# Altium PCB Shield.PcbDoc
Units mm, origin at the board's own origin, x right, y up, seen from the top; angles counter-clockwise.
Board outline 53.01 x 58.42 mm, 2 copper layers (Top, Bottom); 45 components, 50 nets, 181 pads, 111 vias.
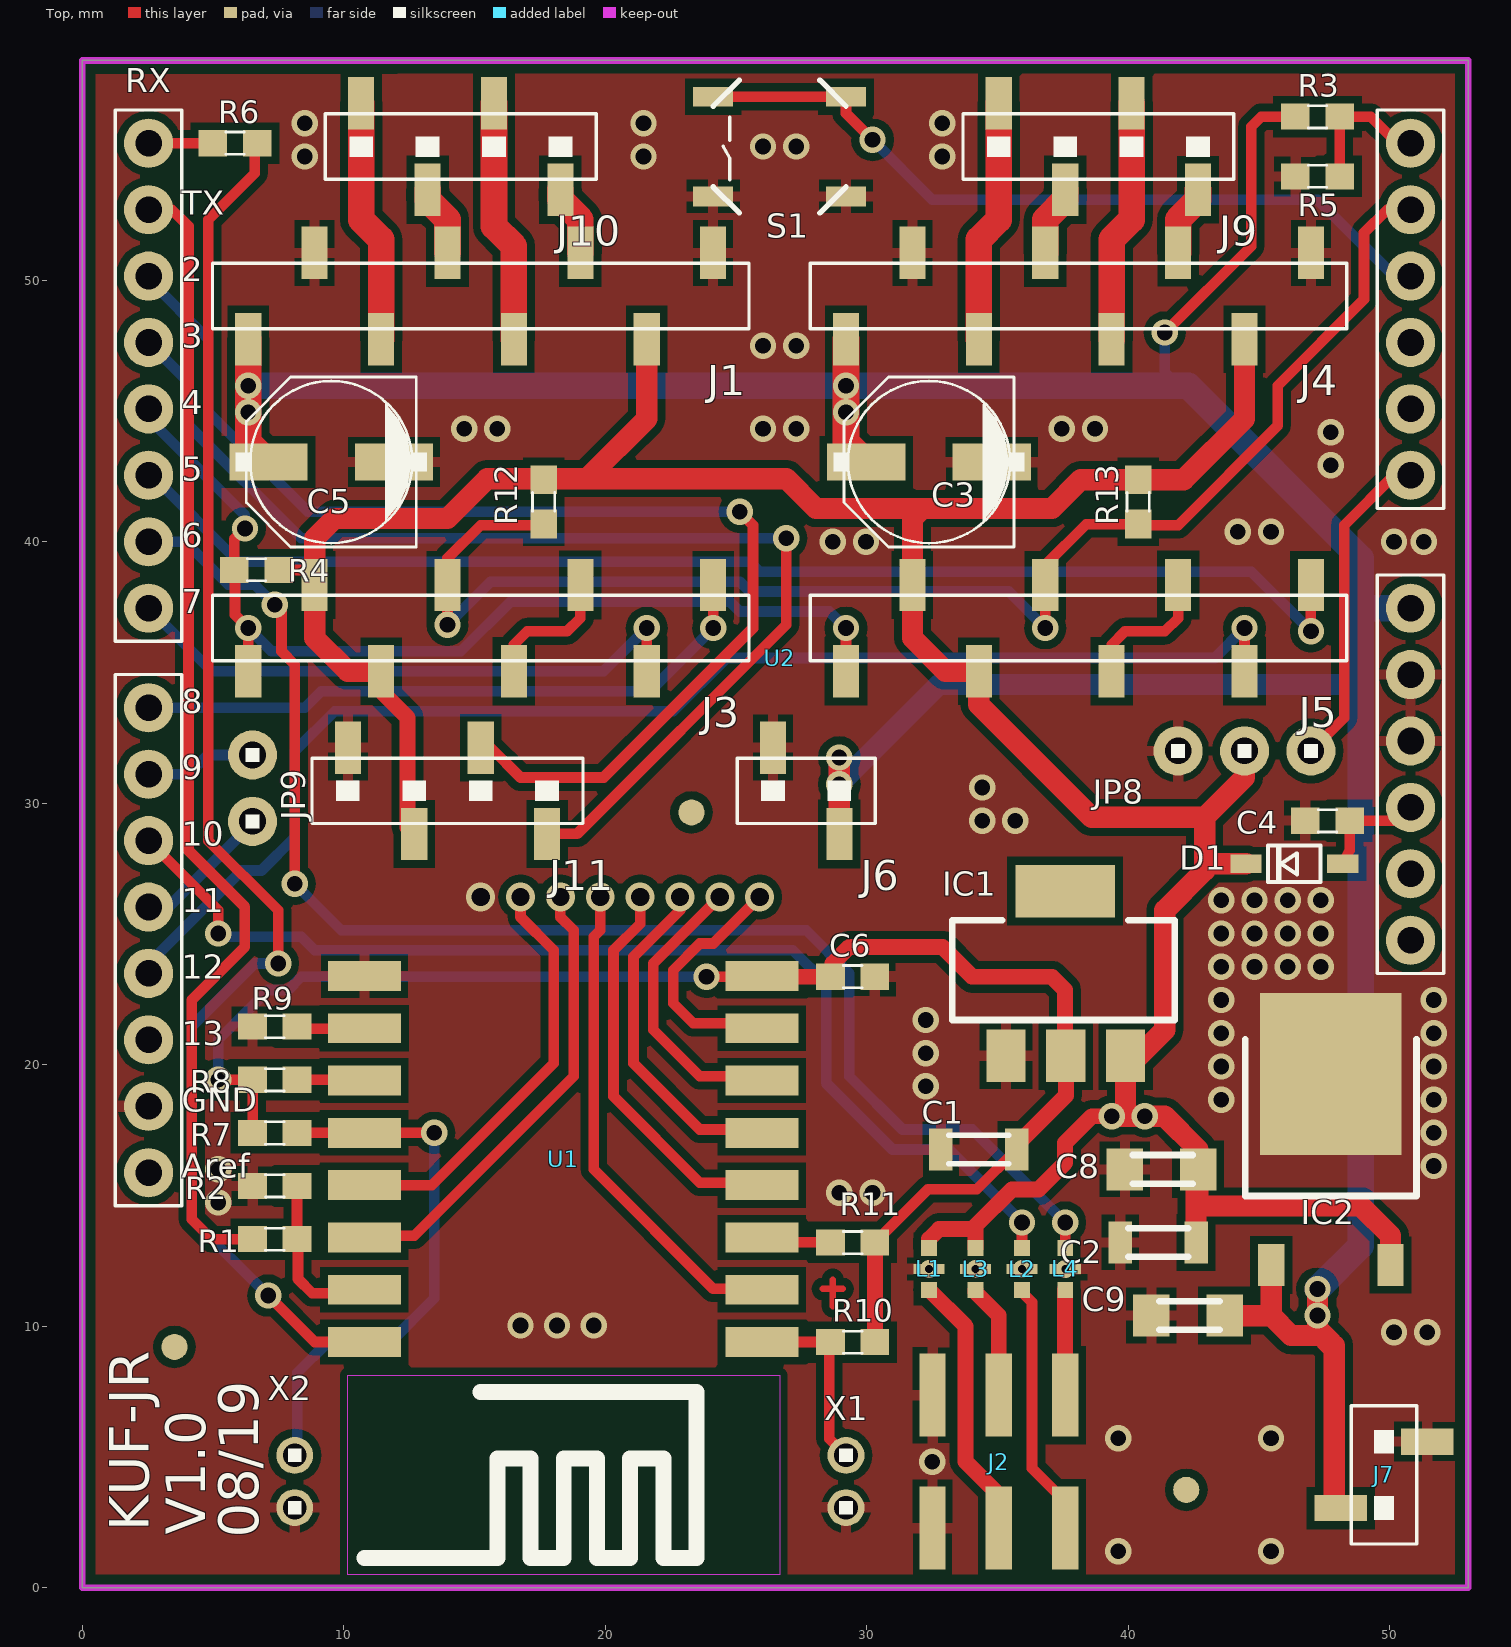
[diagram p0: Top view]
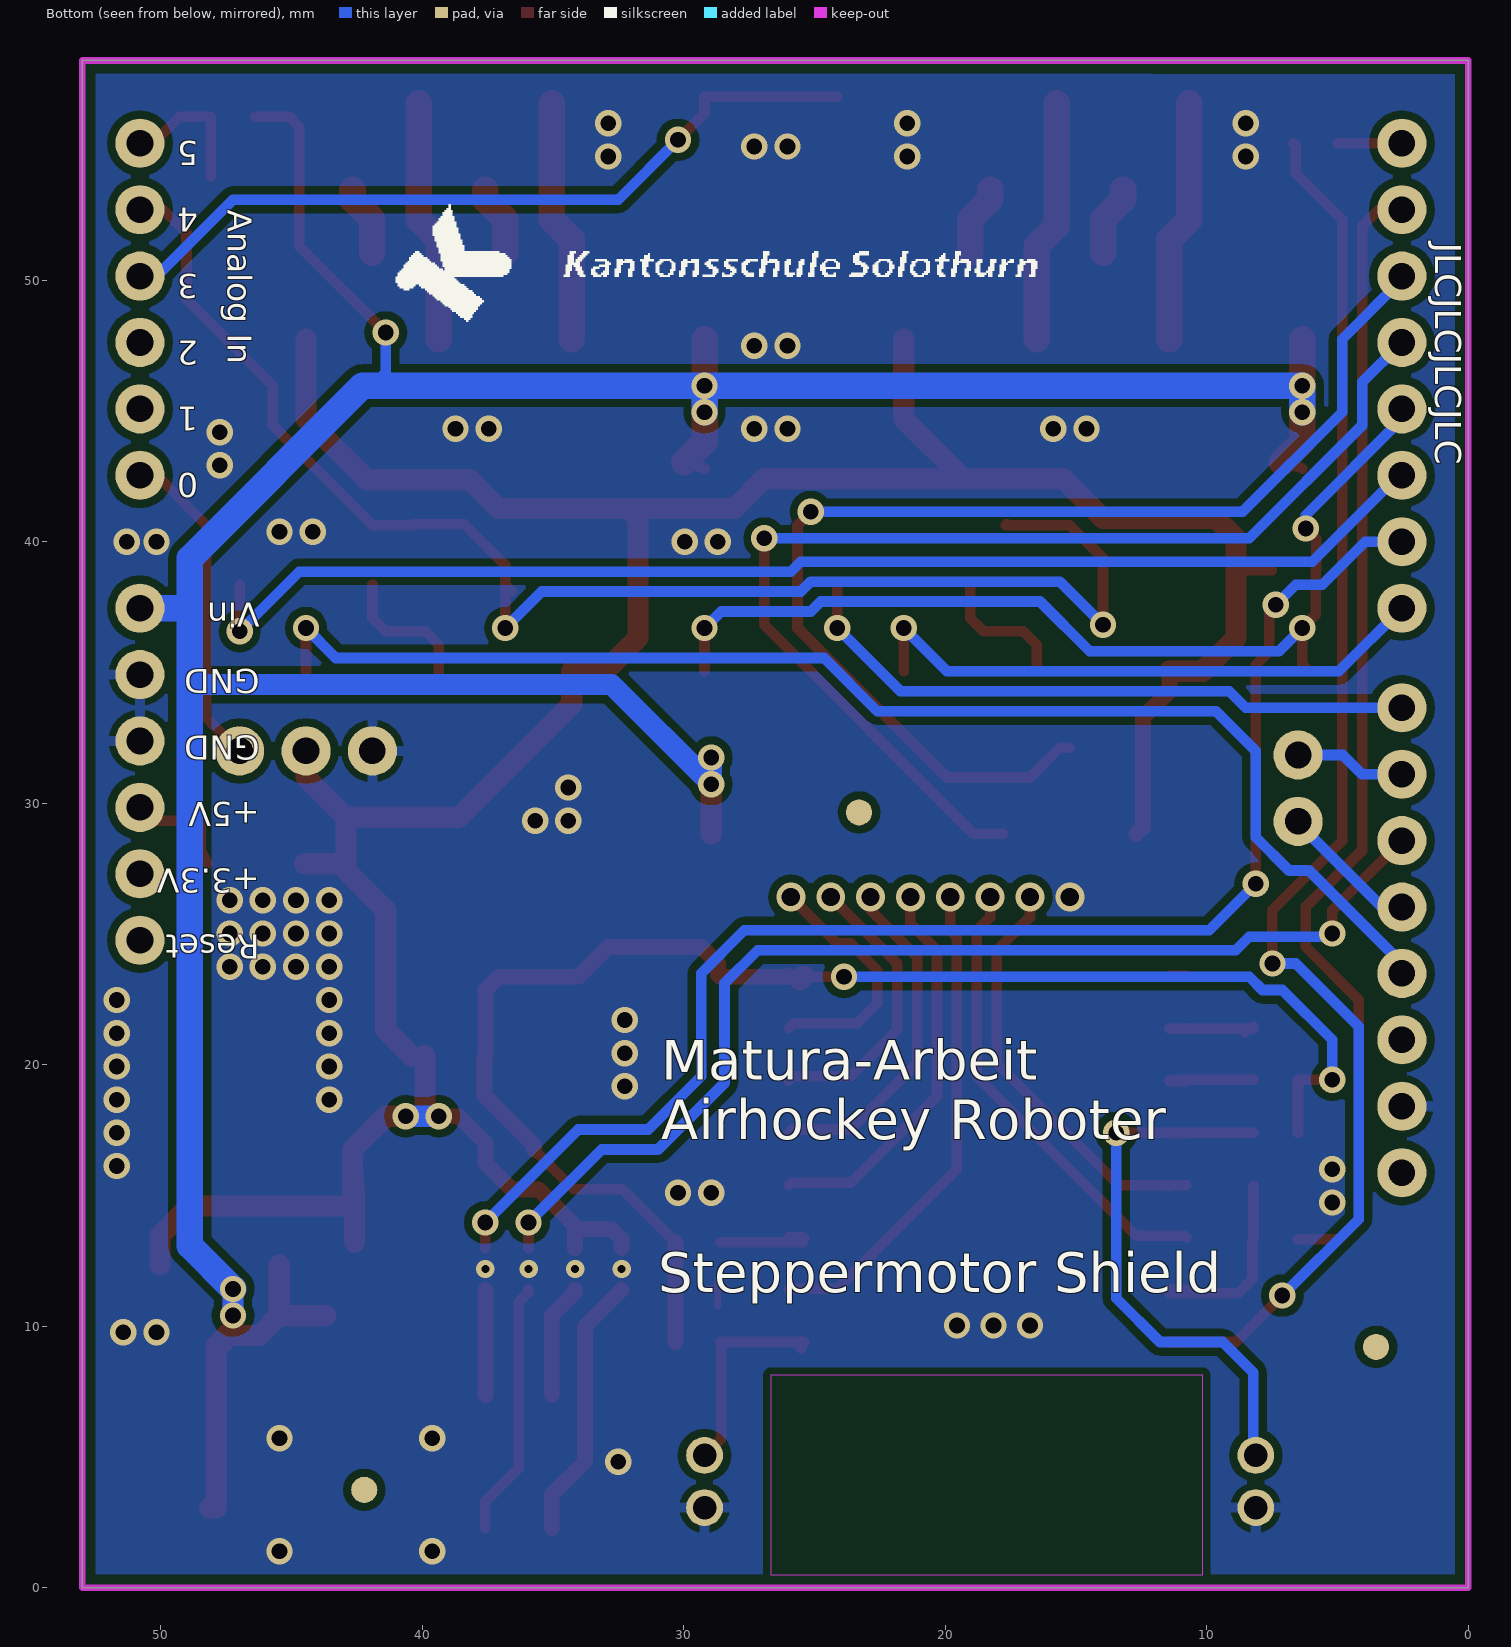
[diagram p1: Bottom view, seen from below]

## Layer stack, top to bottom
Top Solder: solder mask 0.0102, Solder Resist, Dk 3.5
Top: signal copper 0.035
Dielectric 1: dielectric 0.32, FR-4, Dk 4.8
Bottom: signal copper 0.035
Bottom Solder: solder mask 0.0102, Solder Resist, Dk 3.5

## Board outline
12.065,58.41 0,58.41 0,0 53.01,0 53.01,58.41 27.94,58.42 12.7,58.42

## Design rules (kind name [scope] priority, off if disabled: settings)
BoardOutlineClearance mdCopperDimension [All] p1: gap=0.254 ignorepadtopadclearanceinfootprint=FALSE except(0: Arc-SplitContinuation Track-SplitContinuation SMDPad-SplitContinuation THPad-SplitContinuation Via-SplitContinuation Fill-SplitContinuation Poly-SplitContinuation Region-SplitContinuation Text-SplitContinuation; 0.508: Poly-OutlineEdge Poly-CavityEdge Poly-CutoutEdge Poly-SplitBarrior)
Clearance Clearance_for_PolygonClass_Isolate_0 [InPolygonClass('Isolate_0')] p1: gap=0 ignorepadtopadclearanceinfootprint=FALSE except(0.508: Poly-Hole)
Clearance Clearance_for_PolygonClass_Isolate_12 [InPolygonClass('Isolate_12')] p2: gap=0 ignorepadtopadclearanceinfootprint=FALSE except(0.305: Arc-Poly Track-Poly SMDPad-Poly THPad-Poly Via-Poly Fill-Poly Poly-Poly Poly-Region Poly-Text; 0.508: Poly-Hole)
Clearance "Clearance (Same Net)" [All] p3: gap=0.203 ignorepadtopadclearanceinfootprint=FALSE
Clearance [All] p4: gap=0.203 ignorepadtopadclearanceinfootprint=FALSE
HoleSize [All] p1: absolutevalues=TRUE maxlimit=2540 minlimit=0.508 maxpercent=80.000 minpercent=20.000
HoleToHoleClearance mdDrill [All] p1: gap=0.203 allowstackedmicrovias=TRUE
PasteMaskExpansion mlMinCreamFrame [All] p1: expansion=0
PolygonConnect PolygonConnect_For_PolygonThermal_OFF [InPolygonClass('PolygonThermal_OFF')] p1: connectstyle=Direct reliefconductorwidth=0.254 reliefentries=4 polygonreliefangle="90 Angle" airgapwidth=0.254
PolygonConnect PolygonConnect_For_PolygonThermal_ON_Width160000_Gap100000 [InPolygonClass('PolygonThermal_ON_Width160000_Gap100000') vs Not IsVia] p2: connectstyle=Relief reliefconductorwidth=0.406 reliefentries=4 polygonreliefangle="90 Angle" airgapwidth=0.254
PolygonConnect ThermalVias [IsVia] p3: connectstyle=Direct reliefconductorwidth=0.254 reliefentries=4 polygonreliefangle="90 Angle" airgapwidth=0.254
PolygonConnect [All] p4: connectstyle=Relief reliefconductorwidth=0.254 reliefentries=4 polygonreliefangle="90 Angle" airgapwidth=0.254
RoutingVias [All] p1: holewidth=0.508 width=0.914 viastyle="Through Hole" minholewidth=0.508 minwidth=0.914 maxholewidth=2.54 maxwidth=2.54
SolderMaskExpansion mlMinStopFrame [All] p1: expansion=0.102
Width [All] p1: maxlimit=254 minlimit=0.254 preferedwidth=0.254
27 further rules are at their usual default settings.

## Classes and differential pairs
polygon class PolygonThermal_OFF: Polygon_3_Net_GND
polygon class PolygonThermal_ON_Width160000_Gap100000: Polygon_1_Net_GND Polygon_2_Net_GND
polygon class Isolate_0: Polygon_3_Net_GND
polygon class Isolate_12: Polygon_1_Net_GND Polygon_2_Net_GND

## Components (designator, comment, footprint, x,y, rotation, side; value= is the part's Value field where it differs from the comment)
C1 "4.7uF" 1206-CAP 34.29,16.764 r180 top
C2 "4.7uF" 1206-CAP 41.148,13.208 r180 top
C3 "100uF" PANASONIC_D 32.385,43.053 r180 top
C4 ".1uF" 0603-CAP 47.625,29.337 r180 top
C5 "100uF" PANASONIC_D 9.525,43.053 r180 top
C6 ".1uF" 0603-CAP 29.464,23.368 r0 top
C8 "10uF" EIA3216 41.275,16.002 r0 top
C9 "10uF" EIA3216 42.291,10.414 r0 top
D1 "MBR120VLSFT1G" SOD-123 46.355,27.686 r0 top
IC1 "REG1117" SOT223 37.592,23.495 r0 top
IC2 "7805DT" TO252 47.752,17.145 r0 top
J1 "PRT-11543" 1X08_SMD 6.35,49.403 r180 top
J2 "" 2X3_SMT_POSTS 35.052,4.826 r0 top
J3 "" 1X08_SMD 6.35,36.703 r180 top
J4 "PRT-11543" 1X08_SMD 29.21,49.403 r180 top
J5 "PRT-11543" 1X08_SMD 29.21,36.703 r180 top
J6 "" 1X02_SMD_STRAIGHT_REVERSED 27.686,30.48 r180 top
J7 "" 1X02_SMD_STRAIGHT_REVERSED 49.784,4.318 r90 top
J9 "" 1X04_SMD_STRAIGHT_REVERSED 38.862,55.118 r180 top
J10 "" 1X04_SMD_STRAIGHT_REVERSED 14.478,55.118 r180 top
J11 "" 1X04_SMD_STRAIGHT_REVERSED 13.97,30.48 r180 top
JP8 "" 1X03 46.99,32.004 r180 top
JP9 "" 1X02 6.513,31.849 r270 top
L1 "" KNH16_EMI 32.385,12.192 r90 top
L2 "" KNH16_EMI 35.941,12.192 r90 top
L3 "" KNH16_EMI 34.163,12.192 r90 top
L4 "" KNH16_EMI 37.592,12.192 r90 top
R1 "1k" 0603-RES 7.366,13.335 r180 top
R2 "2k2" 0603-RES 7.366,15.367 r0 top
R3 "33k" 0603-RES 47.244,56.261 r180 top
R4 "" 0603-RES 6.667,38.925 r0 top
R5 "22k" 0603-RES 47.244,53.975 r0 top
R6 "1k" 0603-RES 5.842,55.245 r0 top
R7 "10k" 0603-RES 7.366,17.399 r180 top
R8 "10k" 0603-RES 7.366,19.431 r180 top
R9 "" 0603-RES 7.366,21.463 r180 top
R10 "10k" 0603-RES 29.464,9.398 r180 top
R11 "10k" 0603-RES 29.464,13.208 r180 top
R12 "4k7" 0603-RES 17.653,41.529 r90 top
R13 "4k7" 0603-RES 40.386,41.529 r90 top
S1 "" TACTILE_SWITCH_SMD 26.67,55.118 r180 top
U1 "" ESP-12_SMD 19.05,15.113 r90 top
U2 "" DUEMILANOVE_VIAS 0,13.335 r0 top
X1 "87758-0216" 87758-0216 29.21,4.064 r180 top
X2 "87758-0216" 87758-0216 8.128,4.064 r180 top

## Footprints (in the part's own frame and the unit in brackets; to place one, negate y for a bottom-side part, rotate by r counter-clockwise, add the part's x,y. Pads: shape width x height; smd on the part's side, far side on the other; paste and mask are expansions set on the pad)
1X02 [mil] "1X02"
  round 74 / inner round 60 / far side round 74 hole 40: 1(0,0) 2(100,0)
  silkscreen extent -10,-10 110,10, body extent -30,-30 130,30, height 150
1X02_SMD_STRAIGHT_REVERSED [mm] "1X02_SMD_STRAIGHT_REVERSED"
  rect 1x2 smd: 1(1.27,-1.65) 2(-1.27,1.65)
  silkscreen extent -2.64,-1.25 2.64,1.25, body extent -2.71,-2.65 2.71,2.65, height 3.81
1X03 [mil] "1X03"
  round 74 / inner round 60 / far side round 74 hole 40: 1(0,0) 2(100,0) 3(200,0)
  silkscreen extent -10,-10 210,10, body extent -30,-30 230,30, height 150
1X04_SMD_STRAIGHT_REVERSED [mm] "1X04_SMD_STRAIGHT_REVERSED"
  rect 1x2 smd: 1(3.81,-1.65) 2(1.27,1.65) 3(-1.27,-1.65) 4(-3.81,1.65)
  silkscreen extent -5.18,-1.25 5.18,1.25, body extent -5.25,-2.65 5.25,2.65, height 3.81
1X08_SMD [mm] "1X08_SMD"
  rect 1x2 smd: 1(0,1.65) 2(-2.54,-1.65) 3(-5.08,1.65) 4(-7.62,-1.65) 5(-10.16,1.65) 6(-12.7,-1.65) 7(-15.24,1.65) 8(-17.78,-1.65)
  silkscreen extent -19.15,-1.25 1.37,1.25, body extent -19.22,-2.65 1.44,2.65, height 3.81
2X3_SMT_POSTS [mm] "2X3_SMT_POSTS"
  rect 1x3.17 smd: 1(-2.54,-2.54) 2(-2.54,2.54) 3(0,-2.54) 4(0,2.54) 5(2.54,-2.54) 6(2.54,2.54)
  body extent -3.04,-4.12 3.04,4.12, height 1.27
0603-CAP [mm] "0603-CAP"
  rect 1.1x1 smd: 1(-0.85,0) 2(0.85,0)
  silkscreen extent -0.36,-0.42 0.36,0.43, body extent -1.5,-1.01 1.5,1.01, height 3.81
0603-RES [mm] "0603-RES"
  rect 1.1x1 smd: 1(-0.85,0) 2(0.85,0)
  silkscreen extent -0.36,-0.42 0.36,0.43, body extent -1.5,-1.01 1.5,1.01, height 3.81
1206-CAP [mm] "1206-CAP"
  rect 0.9x1.6 smd: P$1(-1.45,0) P$2(1.45,0)
  silkscreen extent -1.15,-0.55 1.15,0.55, body extent -2.05,-1.15 2.05,1.15, height 3.81
87758-0216 [mm] "87758-0216"
  round 1.408 / inner round 1.524 / far side round 1.408 hole 0.9: 1(0,-1) 2(0,1)
  silkscreen extent -0.25,-1.25 0.25,1.25, body extent -0.77,-1.77 0.77,1.77, height 3.81
DUEMILANOVE_VIAS [mil] "DUEMILANOVE_VIAS"
  round 74 / inner round 60 / far side round 74 hole 40: 3.3V(2000,550) 5V(2000,650) A0(2000,1150) A1(2000,1250) A2(2000,1350) A3(2000,1450) A4(2000,1550) A5(2000,1650) AREF(100,100) D2(100,1450) D3(100,1350) D4(100,1250) D5(100,1150) D6(100,1050) D7(100,950) D8(100,800) D9(100,700) D10(100,600) D11(100,500) D12(100,400) D13(100,300) GND@0(2000,750) GND@1(2000,850) GND@2(100,200) RES(2000,450) RX(100,1650) TX(100,1550) VIN(2000,950)
  silkscreen extent 50,50 2050,1700, body extent 47,47 2053,1703, height 150
EIA3216 [mm] "EIA3216"
  rect 1.4x1.6 smd: A(1.4,0) C(-1.4,0)
  body extent -2.1,-0.8 2.1,0.8, height 1.27
ESP-12_SMD [mil] "ESP-12_SMD"
  rect 45x110 smd: S1(-225,-273.43) S2(-146.26,-273.43) S3(-67.52,-273.43) S4(11.22,-273.43) S5(89.96,-273.43) S6(168.7,-273.43) S7(247.44,-273.43) S8(326.18,-273.43) S9(326.18,325) S10(247.44,325) S11(168.7,325) S12(89.96,325) S13(11.22,325) S14(-67.52,325) S15(-146.26,325) S16(-225,325)
  Top keep-out region: -575,350 -275,350 -275,-300 -575,-300 -575,350
  Bottom keep-out region: -575,350 -275,350 -275,-300 -575,-300 -575,350
  silkscreen extent -550,-175 -300,325, body extent -575,-328 349,380, height 150
KNH16_EMI [mil] "KNH16_EMI"
  rect 23.62x23.62 smd: P$1(-31.5,0) P$2(31.5,0)
  rect 15.75x15.75 smd: P$3(0,-15.75) P$4(0,15.75)
  body extent -43,-24 43,24, height 50
PANASONIC_D [mm] "PANASONIC_D"
  rect 3x1.4 smd: +(2.4,0) -(-2.4,0)
  silkscreen extent -3.65,-3.25 3.65,3.25, body extent -3.9,-3.3 3.9,3.3, height 3.81
SOD-123 [mm] "SOD-123"
  rect 1.2x0.7 smd: A(1.85,0) C(-1.85,0)
  silkscreen extent -1,-0.7 1,0.7, body extent -2.45,-0.78 2.45,0.78, height 3.81
SOT223 [mil] "SOT223"
  rect 59x79 smd: 1(-89,-124) 2(1,-124) 3(91,-124)
  rect 150x79 smd: 4(0,124)
  body extent -118,-164 120,164, height 150
TACTILE_SWITCH_SMD [mil] "TACTILE_SWITCH_SMD"
  rect 60x30 smd: 1(-100,75) 2(100,75) 3(-100,-75) 4(100,-75)
  silkscreen extent -100,-100 100,100, body extent -130,-104 130,104, height 150
TO252 [mm] "TO252"
  rect 1x1.6 smd: 1(-2.28,-4.8) 2(2.28,-4.8)
  rect 5.4x6.2 smd: 3(0,2.5)
  body extent -3.39,-5.6 3.39,5.6, height 3.81

## Part data
C1 C2: library part 1206-CAP, PackageName=1206-CAP
C3 C5: library part PANASONIC_D, PackageName=PANASONIC_D
C4 C6: library part 0603-CAP, PackageName=0603-CAP
C8 C9: library part EIA3216, PackageName=EIA3216
D1: library part SOD-123, PackageName=SOD-123
IC1: library part SOT223, PackageName=SOT223
IC2: library part TO252, PackageName=TO252
J1 J3 J4 J5: library part 1X08_SMD, PackageName=1X08_SMD
J2: library part 2X3_SMT_POSTS, PackageName=2X3_SMT_POSTS
J6 J7: library part 1X02_SMD_STRAIGHT_REVERSED, PackageName=1X02_SMD_STRAIGHT_REVERSED
J9 J10 J11: library part 1X04_SMD_STRAIGHT_REVERSED, PackageName=1X04_SMD_STRAIGHT_REVERSED
JP8: library part 1X03, PackageName=1X03
JP9: library part 1X02, PackageName=1X02
L1 L2 L3 L4: library part KNH16_EMI, PackageName=KNH16_EMI
R1 R2 R3 R4 R5 R6 R7 R8 R9 R10 R11 R12 R13: library part 0603-RES, PackageName=0603-RES
S1: library part TACTILE_SWITCH_SMD, PackageName=TACTILE_SWITCH_SMD
U1: library part ESP-12_SMD, PackageName=ESP-12_SMD
U2: library part DUEMILANOVE_VIAS, PackageName=DUEMILANOVE_VIAS
X1 X2: PackageName=87758-0216

## Free pads (board coordinates)
  round 1 all layers, no hole: 4(3.527,9.213) 4(23.3,29.654)
  round 1 all layers, no hole paste+0: 4(42.223,3.746)

## Via types
v1: diameter 1.006/1.006 (per signal layer), hole 0.6, Top to Bottom, tented both sides, 99 vias
v2: diameter 1.106/1.106 (per signal layer), hole 0.7, Top to Bottom, 8 vias
v3: diameter 0.706/0.706 (per signal layer), hole 0.3, Top to Bottom, tented both sides, 4 vias

## Nets (pads, with @x,y where several pads share a name; then routed paths per layer and width w, separated by ;. In a path a pad name is that pad's centre, name@x,y a point inside that pad or via, vN(x,y) a via of type N, cw(c..) or ccw(c..) an arc to the next point about the centre after c; other vN are vias at no path point)
3.3V: C1.P$1 C6.1 IC1.2 R7.2 R8.2 R10.1 R11.1 U1.S8 | length 57.7
  Top w0.406: v1(5.207,19.431) R8.2 R7.2 ; v1(23.876,23.368) 25.385,23.368 25.415,23.398 U1.S8 U1.S8@25.995,23.256 ; R11.1 32.346,15.24 34.216,15.24 C1.P$1 C1.P$1@35.814,16.69
  Top w0.61: U1.S8 26.025,23.368 C6.1 28.702,23.456 28.702,23.876 29.337,24.511 32.893,24.511 34.036,23.368 37.084,23.368 37.592,22.86 37.592,20.371 IC1.2 37.617,18.821 35.74,16.944 C1.P$1 ; R10.1 R11.1
  Top w0.813: U1.S8@25.415,23.398 U1.S8@25.557,23.256
  Bottom w0.406: v1(5.207,19.431) 5.207,20.955 7.112,22.86 7.874,22.86 8.382,23.368 v1(23.876,23.368)
5V: C2.P$1 C8.A D1.C IC1.3 IC2.2 J1.7 J3.2 J3.3 J4.7 J5.2 J5.3 J11.2 JP8.2 L1.P$2 L3.P$2 R4.2 R12.2 R13.2 | length 131.8
  Top w0.305: v1@40.64,17.777 v1(40.64,18.034)
  Top w0.406: R4.2 8.826,38.925 J3.2@8.89,38.862 ; R12.2 19.265,42.379 19.304,42.418
  Top w0.61: J3.3 J3.3 11.43,34.29 12.446,33.274 12.446,29.084 J11.2 ; L1.P$2 32.385,13.335 32.766,13.716 34.163,13.716 ; L3.P$2 34.163,13.716 ; v1(39.37,18.034) 38.608,18.034 37.592,17.018 37.592,16.256 36.576,15.24 35.56,15.24 34.163,13.843 34.163,13.716 ; 39.878,18.034 39.903,18.059 ; IC1.3 39.929,20.32 IC1.3@40.386,20.32 ; 42.926,27.432 42.926,27.686
  Top w0.813: J3.3 J3.3 10.16,35.052 8.89,36.322 J3.2 8.89,38.862 8.89,40.132 9.652,40.894 13.97,40.894 15.494,42.418 19.304,42.418 ; J1.7 21.59,44.704 19.304,42.418 ; v1(39.37,18.034) 39.878,18.034 v1(40.64,18.034) 41.402,18.034 42.675,16.761 C8.A ; 39.903,18.059 IC1.3 ; IC1.3@40.386,20.32 41.402,21.336 41.402,25.908 42.926,27.432 ; C2.P$1 42.598,15.163 C8.A ; JP8.2 44.45,30.988 42.926,29.464 ; J4.7 44.45,44.704 42.125,42.379 R13.2 38.188,42.379 37.084,41.275 32.131,41.275 ; D1.C 42.926,27.686 42.926,29.464 ; IC2.2 50.032,13.468 48.895,14.605 42.675,14.605 C8.A ; 19.304,42.418 26.924,42.418 28.067,41.275 32.131,41.275 ; 32.131,41.275 31.75,40.894 J5.2 31.75,36.322 33.019,35.053 J5.3 34.29,33.782 38.608,29.464 42.926,29.464
  Bottom w0.813: v1(39.37,18.034) v1(40.64,18.034)
A0: JP8.1 U2.A0 | length 12.5
  Top w0.406: JP8.1 48.26,33.274 48.26,40.64 50.165,42.545 U2.A0
A3: S1.3 S1.4 U2.A3 | length 29.9
  Top w0.406: S1.4 S1.3 29.21,56.388 v1(30.226,55.372)
  Bottom w0.406: v1(30.226,55.372) 32.512,53.086 47.244,53.086 50.165,50.165 U2.A3
A4: J3.4 J5.4 R12.1 R13.1 U2.A4 | length 55.9
  Top w0.406: v1(13.97,36.83) J3.4 13.97,39.37 15.24,40.64 17.692,40.64 R12.1 ; J5.4@36.577,38.1 36.704,38.227 J5.4 ; v1(36.83,36.703) J5.4 ; U2.A4 49.911,52.705 49.022,51.816 49.022,49.276 45.72,45.974 45.72,44.45 41.91,40.64 40.425,40.64 R13.1 38.393,40.679 36.83,39.116 J5.4
  Bottom w0.406: v1(13.97,36.83) 15.621,38.481 25.146,38.481 25.527,38.1 35.433,38.1 v1(36.83,36.703)
ADC: U1.S2 | length 18.9
  Top w0.406: v2(19.812,26.416) 19.812,25.146 19.558,24.892 19.558,16.002 24.13,11.43 25.963,11.43 U1.S2
D4: J3.1 J5.1 R4.1 U2.D4 | length 38.2
  Top w0.406: J3.1@6.223,35.179 J3.1 ; v1(6.223,40.513) 5.818,40.108 R4.1 5.842,38.901 5.842,37.211 v1(6.35,36.703) J3.1 J3.1 ; J5.1 v1(29.21,36.703)
  Bottom w0.406: U2.D4 2.54,44.704 6.223,41.021 v1(6.223,40.513) ; v1(6.35,36.703) 7.239,35.814 14.478,35.814 16.383,37.719 24.765,37.719 25.146,37.338 28.575,37.338 v1(29.21,36.703)
D5: J5.8 U2.D5 | length 48.8
  Top w0.406: v1(46.99,36.576) J5.8
  Bottom w0.406: U2.D5@2.413,42.545 U2.D5 2.667,42.545 5.969,39.243 25.527,39.243 25.908,38.862 44.704,38.862 v1(46.99,36.576)
D7: J3.7 U2.D7 | length 22.4
  Top w0.406: J3.7 v1(21.59,36.703)
  Bottom w0.406: U2.D7 4.953,35.052 19.939,35.052 v1(21.59,36.703)
D8: J3.8 U2.D8 | length 24.5
  Top w0.406: v1(24.13,36.703) J3.8
  Bottom w0.406: U2.D8 8.509,33.655 9.144,34.29 21.717,34.29 v1(24.13,36.703)
D9: JP9.1 U2.D9 | length 4.3
  Bottom w0.406: U2.D9 4.064,31.115 4.798,31.849 JP9.1
D11: JP9.2 U2.D11 | length 5.4
  Bottom w0.406: U2.D11 3.302,26.035 6.513,29.246 JP9.2
D12: J5.7 U2.D12 | length 51.2
  Top w0.406: J5.7 v1(44.45,36.703)
  Bottom w0.406: U2.D12 2.54,23.876 6.096,27.432 6.858,27.432 8.128,28.702 8.128,32.004 9.652,33.528 22.606,33.528 24.638,35.56 43.307,35.56 v1(44.45,36.703)
ESP_RXD: R1.1 R2.2 U1.S15 | length 7.7
  Top w0.406: R2.2 R1.1 8.255,13.296 8.255,11.811 8.795,11.271 11.43,11.271 11.43,11.383 11.415,11.398 U1.S15
ESP_TXD: R6.2 U1.S16 | length 54.7
  Top w0.406: R6.2 6.604,55.157 6.604,54.102 4.826,52.324 4.826,28.575 7.493,25.908 v1(7.493,23.876) ; v1(7.112,11.176) 8.89,9.398 U1.S16 ; U1.S16 10.81,9.383 11.43,9.383 11.415,9.398 U1.S16
  Bottom w0.406: v1(7.112,11.176) 4.191,14.097 4.191,21.463 6.604,23.876 v1(7.493,23.876)
GND: C1.P$2 C2.P$2 C3.- C4.2 C5.- C6.2 C8.C C9.C IC1.1 IC2.3 J1.2 J1.8 J2.1 J2.2 J4.2 J4.8 J6.1 J7.1 J11.1 JP8.3 L1.P$3 L1.P$4 L2.P$3 L2.P$4 L3.P$3 L3.P$4 L4.P$3 L4.P$4 R2.1 R5.1 R9.2 S1.1 S1.2 U1.S9 U2.GND@0 U2.GND@1 U2.GND@2 X1.2 X2.2 | length 0.6
  Top w0.406: U1.S9 11.415,23.398 U1.S9@11.43,23.383
  other v1: 39.624,1.397 45.466,1.397 32.512,4.826 39.624,5.715 45.466,5.715 50.165,9.779 51.435,9.779 16.764,10.033 18.161,10.033 19.558,10.033 5.207,14.732 28.956,15.113 30.226,15.113 5.207,16.002 51.689,16.129 51.689,17.399 43.561,18.669 51.689,18.669 32.258,19.177 43.561,19.939 51.689,19.939 32.258,20.447 43.561,21.209 51.689,21.209 32.258,21.717 43.561,22.479 51.689,22.479 43.561,23.749 44.831,23.749 46.101,23.749 47.371,23.749 43.561,25.019 44.831,25.019 46.101,25.019 47.371,25.019 43.561,26.289 44.831,26.289 46.101,26.289 47.371,26.289 34.417,29.337 35.687,29.337 34.417,30.607 28.702,40.005 29.972,40.005 50.165,40.005 51.308,40.005 44.196,40.386 45.466,40.386 47.752,42.926 47.752,44.196 14.605,44.323 15.875,44.323 26.035,44.323 27.305,44.323 37.465,44.323 38.735,44.323 26.035,47.498 27.305,47.498 8.509,54.737 21.463,54.737 32.893,54.737 26.035,55.118 27.305,55.118 8.509,56.007 21.463,56.007 32.893,56.007
  other v2: 15.24,26.416
  other v3: 32.385,12.192 34.163,12.192 35.941,12.192 37.592,12.192
GPIO4: U1.S14 | length 17.6
  Top w0.406: U1.S14 10.859,13.462 12.7,13.462 18.796,19.558 18.796,25.146 18.288,25.654 v2(18.288,26.416)
GPIO5: U1.S13 | length 16.1
  Top w0.406: U1.S13 U1.S13@11.415,15.398 ; U1.S13@11.446,15.367 U1.S13@11.415,15.398 ; v2(16.764,26.416) 16.764,25.654 18.034,24.384 18.034,20.066 13.366,15.398 U1.S13@11.415,15.398
GPIO12: U1.S6 | length 11.1
  Top w0.406: v2(24.384,26.416) 21.844,23.876 21.844,21.336 23.622,19.558 25.835,19.558 U1.S6
GPIO13: U1.S7 | length 9.5
  Top w0.406: v2(25.908,26.416) 24.13,24.638 23.622,24.638 22.606,23.622 22.606,22.352 23.368,21.59 25.803,21.59 U1.S7
GPIO14: U1.S5 | length 13.1
  Top w0.406: v2(22.86,26.416) 22.86,25.908 21.082,24.13 21.082,20.066 23.622,17.526 25.867,17.526 U1.S5
GPIO16: U1.S4 | length 15.1
  Top w0.406: v2(21.336,26.416) 21.336,25.4 20.32,24.384 20.32,18.796 23.622,15.494 25.899,15.494 U1.S4
IMU_SCL: J11.4 U2.D3 | length 44.2
  Top w0.406: J11.4 18.924,28.83 26.924,36.83 v1(26.924,40.132)
  Bottom w0.406: U2.D3 4.064,46.101 4.064,44.45 8.382,40.132 v1(26.924,40.132)
IMU_SDA: J11.3 U2.D2 | length 46
  Top w0.406: J11.3 15.622,32.13 16.764,30.988 19.939,30.988 25.654,36.703 25.654,40.64 v1(25.146,41.148)
  Bottom w0.406: U2.D2 2.54,50.038 4.826,47.752 4.826,44.958 8.636,41.148 v1(25.146,41.148)
N$1: J1.3 J10.1 | length 9.3
  Top w1.016: J10.1 10.668,52.324 11.43,51.562 J1.3
N$2: J1.4 J10.2 | length 2.7
  Top w1.016: J10.2 13.208,53.086 13.97,52.324 J1.4
N$3: R7.1 U1.S12 X2.1 | length 22.5
  Top w0.406: R7.1 11.414,17.399 11.43,17.383 10.795,17.383 U1.S12 U1.S12 v1(13.462,17.399)
  Bottom w0.406: X2.1 8.219,5.318 8.219,8.219 9.398,9.398 11.791,9.398 13.462,11.069 v1(13.462,17.399)
N$4: R8.1 U1.S11 | length 3.7
  Top w0.406: R8.1 U1.S11@11.176,19.431 ; U1.S11 10.795,19.383 U1.S11@11.176,19.383 ; U1.S11@11.255,19.431 U1.S11@11.176,19.431 ; U1.S11@11.43,19.383 U1.S11@11.176,19.383 ; U1.S11@11.176,19.383 U1.S11@11.176,19.431
N$5: R1.2 U2.TX | length 44.1
  Top w0.406: U2.TX 3.429,52.705 4.064,52.07 4.064,28.194 6.223,26.035 6.223,24.511 4.191,22.479 4.191,14.097 4.953,13.335 R1.2
N$6: J1.5 J10.3 | length 9.3
  Top w1.016: J10.3 15.748,52.07 16.51,51.308 J1.5
N$7: J1.6 J10.4 | length 2.7
  Top w1.016: J10.4 18.288,53.086 19.05,52.324 J1.6
N$8: J4.3 J9.1 | length 9.3
  Top w1.016: J4.3 34.29,51.562 35.052,52.324 J9.1
N$9: J4.4 J9.2 | length 2.7
  Top w1.016: J4.4 36.83,52.324 37.592,53.086 J9.2
N$10: J4.5 J9.3 | length 9.3
  Top w1.016: J4.5 39.37,51.562 40.132,52.324 J9.3
N$11: J3.5 J3.6 | length 5.2
  Top w0.406: J3.5 16.51,36.068 17.018,36.576 18.542,36.576 19.05,37.084 J3.6
N$12: J5.5 J5.6 | length 5.2
  Top w0.406: J5.5 39.37,36.068 39.878,36.576 41.402,36.576 41.91,37.084 J5.6
N$13: R3.1 R5.2 U2.A5 | length 5.4
  Top w0.406: R5.2 R3.1 49.276,56.261 50.292,55.245 U2.A5
N$14: R6.1 U2.RX | length 2.5
  Top w0.406: U2.RX R6.1
N$16: J4.6 J9.4 | length 2.7
  Top w1.016: J4.6 41.91,52.324 42.672,53.086 J9.4
N$17: J2.4 L3.P$1 | length 4.4
  Top w0.61: L3.P$1 34.163,11.303 35.052,10.414 J2.4
N$18: R9.1 U1.S10 | length 3.7
  Top w0.406: R9.1@8.55,21.256 R9.1 8.216,21.383 U1.S10@10.795,21.383 ; U1.S10 U1.S10@10.795,21.383 ; U1.S10@11.43,21.383 U1.S10@10.795,21.383
N$19: J2.6 L4.P$1 | length 4
  Top w0.61: J2.6 L4.P$1
N$20: J2.3 L1.P$1 | length 10.2
  Top w0.61: L1.P$1 33.782,9.995 33.782,4.826 35.052,3.556 J2.3
N$26: C4.1 D1.A U2.5V | length 4.3
  Top w0.406: D1.A 48.475,28.21 C4.1 50.292,29.337 U2.5V
N$27: R11.2 U1.S3 | length 4
  Top w0.406: U1.S3 25.415,13.398 25.4,13.383 25.448,13.335 25.448,13.208 R11.2
N$28: J2.5 L2.P$1 | length 9.8
  Top w0.406: L2.P$1 35.941,11.303 36.322,10.922 36.322,4.572 37.592,3.302 J2.5
RST: R10.2 U1.S1 X1.1 | length 8.1
  Top w0.406: U1.S1@25.512,9.144 25.512,9.271 25.4,9.383 25.415,9.398 U1.S1 R10.2 28.575,9.359 28.575,5.699 X1.1
SERVO1: L2.P$2 U2.D10 | length 43.2
  Top w0.406: U2.D10 5.207,25.908 v1(5.207,25.019) ; L2.P$2 v1(35.941,13.97)
  Bottom w0.406: v1(5.207,25.019) 5.334,24.892 8.382,24.892 8.89,24.384 27.178,24.384 28.448,23.114 28.448,19.304 30.988,16.764 33.147,16.764 v1(35.941,13.97)
SERVO2: L4.P$2 U2.D6 | length 54.9
  Top w0.406: v1(7.366,37.592) 7.62,37.338 7.62,35.814 8.128,35.306 v1(8.128,26.924) ; L4.P$2 v1(37.592,13.97)
  Bottom w0.406: U2.D6 3.937,40.005 5.588,38.354 6.604,38.354 v1(7.366,37.592) ; v1(8.128,26.924) 9.906,25.146 27.686,25.146 29.337,23.495 29.337,19.558 31.369,17.526 34.036,17.526 v1(37.592,13.97)
VIN: C3.+ C5.+ C9.A IC2.1 J1.1 J4.1 J6.2 J7.2 R3.2 U2.VIN | length 144.8
  Top w0.406: C5.+@6.35,42.799 C5.+ ; C3.+@29.21,42.799 C3.+ ; v1(41.402,48.006) 44.704,51.308 44.704,55.88 45.085,56.261 R3.2
  Top w0.813: J6.2 v1(28.956,30.734) v1(28.956,31.75) ; C9.A 43.697,10.408 45.472,10.408 ; IC2.1 45.472,10.408 ; v1(47.244,11.43) v1(47.244,10.414) 47.244,9.906 47.752,9.398 47.688,9.335 ; 47.879,9.271 47.879,9.144 ; J7.2 47.879,3.048 47.879,9.144 ; 45.472,10.408 46.228,9.652 47.371,9.652 47.688,9.335 ; 47.688,9.335 47.879,9.144
  Top w1.016: J1.1 v1(6.35,45.974) 6.35,43.828 C5.+ ; J4.1 v1(29.21,44.958) 29.21,43.828 C3.+
  Bottom w0.406: v1(41.402,48.006) 41.402,46.482 41.91,45.974
  Bottom w0.813: v1(28.956,31.75) v1(28.956,30.734) 32.766,34.544 48.895,34.544 ; v1(47.244,10.414) v1(47.244,11.43)
  Bottom w1.016: v1(6.35,44.958) v1(6.35,45.974) v1(29.21,45.974) ; v1(29.21,44.958) v1(29.21,45.974) ; v1(47.244,11.43) 48.895,13.081 48.895,34.544 48.895,37.465 ; U2.VIN 48.895,37.465 ; v1(29.21,45.974) 41.402,45.974 41.91,45.974 42.291,45.974 48.895,39.37 48.895,37.465
pads on no net: IC1.4 U2.3.3V U2.A1 U2.A2 U2.AREF U2.D13 U2.RES
copper on no net: | length 1.8
  Top w0.254: 28.321,11.43 28.702,11.43 29.083,11.43 ; 28.702,10.763 28.702,11.779

## Polygon pours and split planes (outlines as drawn)
GND on Top "Polygon_1_Net_GND" (solid, remove dead copper, pour order 2): -0.203,58.623 53.543,58.623 53.543,-0.838 -0.203,-0.838
GND on Top "Polygon_3_Net_GND" (solid, remove dead copper, pour order 0): 44.247,23.317 51.257,23.317 51.257,15.799 44.247,15.799
GND on Bottom "Polygon_2_Net_GND" (solid, remove dead copper, pour order 1): -0.203,58.623 53.543,58.623 53.543,-0.203 -0.203,-0.203

## Keep-outs
Keep-Out Layer:
  lines w0: 0,0 53.01,0 53.01,58.41 27.94,58.42 12.7,58.42 12.065,58.41 0,58.41 0,0
  lines w0.254: 0,0 0,58.41 53.01,58.41 53.01,0 0,0

## Silkscreen, mask and mechanical layers (free items; w line width, h text height)
Top Overlay:
  lines w0.254: 35.179,25.527 33.274,25.527 33.274,21.717 41.783,21.717 41.783,25.527 40.005,25.527 ; 39.998,12.66 42.298,12.66 ; 39.998,13.756 42.298,13.756 ; 40.175,15.454 42.475,15.454 ; 40.175,16.55 42.475,16.55 ; 41.191,9.866 43.491,9.866 ; 41.191,10.962 43.491,10.962 ; 51.029,20.98 51.029,14.986 44.475,14.986 44.475,20.98 ; 44.475,20.98 44.475,20.98
  text "KUF-JR" at 2.54,2.159 h1.52 r90
  text "V1.0" at 4.699,2.032 h1.52 r90
  text "08/19" at 6.731,1.905 h1.52 r90
Bottom Overlay:
  drawing of 27 lines, arcs and shapes, not listed
  text "JLCJLCJLCJLC" at 1.27,51.435 h1 r90
  text "Matura-Arbeit" at 30.861,19.431 h1.52
  text "Airhockey Roboter" at 30.861,17.145 h1.52
  text "Steppermotor Shield" at 30.988,11.303 h1.52
Dimension:
  the board outline again, w0
Top Assembly:
  drawing of 468 lines, arcs and shapes, not listed
  text "1" at 12.878,56.693 h1.97
  text "MOTOR" at 16.688,56.693 h1.97
  text "2" at 37.262,56.693 h1.97
  text "MOTOR" at 40.945,56.693 h1.97
  text "VMT" at 7.253,47.022 h1.26
  text "VMT" at 30.113,47.022 h1.26
  text "GND" at 22.712,46.767 h1.26
  text "GND" at 45.572,46.767 h1.26
  text "A4988" at 13.727,45.059 h1.97
  text "A4988" at 36.587,45.059 h1.97
  text "DIR" at 21.226,38.386 h1.26
  text "DIR" at 44.086,38.386 h1.26
  text "!EN" at 28.233,38.132 h1.26
  text "GND" at 40.945,34.214 h1.26
  text "SIG" at 46.025,34.214 h1.26
  text "+" at 29.755,32.252 h2.6 r90
  text "5V" at 11.735,32.055 h1.42
  text "SCL" at 16.688,32.055 h1.42
  text "SENSOR" at 35.645,31.654 h1.26
  text "-" at 25.324,31.293 h2.6
  text "VIN" at 30.531,30.023 h1.97
  text "I2C" at 19.794,29.929 h1.97
  text "5V" at 43.993,29.134 h1.26
  text "-" at 26.086,27.864 h2.6
  text "GND" at 8.941,27.737 h1.42
  text "SDA" at 14.021,27.737 h1.42
  text "v3.1" at 29.679,25.533 h2.2
  text "GND" at 31.166,9.195 h1.42
  text "5V" at 34.595,9.195 h1.42
  text "SIG" at 37.135,9.195 h1.42
  text "VIN" at 48.348,7.197 h1.97
  text "SERVO" at 39.294,7.036 h1.97
  text "Flash" at 8.585,6.528 h1.42 r90
  text "-" at 47.864,5.416 h2.6 r90
  text "2" at 39.294,5.131 h1.97
  text "SERVO" at 39.294,2.845 h1.97
  text "+" at 52.488,2.534 h2.6 r90
  text "RESET" at 27.889,2.083 h1.42 r90
  text "1" at 39.294,0.94 h1.97
Bottom Assembly:
  drawing of 1658 lines, arcs and shapes, not listed
  text "ESP GPIOs" at 24.181,27.864 h1.57
  text "GND" at 15.57,24.841 h1.42 r90
  text "5" at 17.094,24.841 h1.42 r90
  text "4" at 18.618,24.841 h1.42 r90
  text "ADC" at 20.142,24.841 h1.42 r90
  text "16" at 21.666,24.841 h1.42 r90
  text "14" at 23.19,24.841 h1.42 r90
  text "12" at 24.714,24.841 h1.42 r90
  text "13" at 26.238,24.841 h1.42 r90
Unrouted:
  lines w0: 32.385,12.192 32.785,12.192 ; 34.163,12.192 34.563,12.192 ; 37.192,12.192 37.592,12.192

## Text inside footprints (layer, text, board x,y; h text height)
U1: Top Assembly "ESP-12" at 19.05,12.573 h1.97 r90
U2: Top Overlay "RX" at 1.651,56.896 h1.57; Top Overlay "TX" at 3.81,52.197 h1.57; Top Overlay "2" at 3.81,49.657 h1.57; Top Overlay "3" at 3.81,47.117 h1.57; Top Overlay "4" at 3.81,44.577 h1.57; Top Overlay "5" at 3.81,42.037 h1.57; Top Overlay "6" at 3.81,39.497 h1.57; Top Overlay "7" at 3.81,36.957 h1.57; Top Overlay "8" at 3.81,33.147 h1.57; Top Overlay "9" at 3.81,30.607 h1.57; Top Overlay "10" at 3.81,28.067 h1.57; Top Overlay "Aref" at 3.81,15.367 h1.57; Top Overlay "GND" at 3.81,17.907 h1.57; Top Overlay "12" at 3.81,22.987 h1.57; Top Overlay "11" at 3.81,25.527 h1.57; Top Overlay "13" at 3.81,20.447 h1.57; Bottom Overlay "Analog In" at 47.752,52.705 h1.57 r90; Bottom Overlay "0" at 48.565,42.926 h1.57 r180; Bottom Overlay "1" at 48.565,45.466 h1.57 r180; Bottom Overlay "2" at 48.565,48.006 h1.57 r180; Bottom Overlay "3" at 48.565,50.546 h1.57 r180; Bottom Overlay "4" at 48.565,53.086 h1.57 r180; Bottom Overlay "5" at 48.565,55.626 h1.57 r180; Bottom Overlay "Vin" at 46.221,37.973 h1.57 r180; Bottom Overlay "GND" at 46.221,35.433 h1.57 r180; Bottom Overlay "GND" at 46.221,32.893 h1.57 r180; Bottom Overlay "+5V" at 46.221,30.353 h1.57 r180; Bottom Overlay "+3.3V" at 46.221,27.813 h1.57 r180; Bottom Overlay "Reset" at 46.221,25.273 h1.57 r180
X1: Top Assembly "1" at 29.86,5.814 h0.26 r180
X2: Top Assembly "1" at 8.778,5.814 h0.26 r180